# Altium PCB 07-AudioAmplifier(TDA7297).PcbDoc
Units mm, origin at the board's own origin, x right, y up, seen from the top; angles counter-clockwise.
Board outline 40 x 40 mm, 4 copper layers (Top Layer, Internal Plane 1, Internal Plane 2, Bottom Layer), stack 0.462 mm thick; 19 components, 18 nets, 58 pads, 16 vias.
Unrouted connection lines stored in the file: 37.
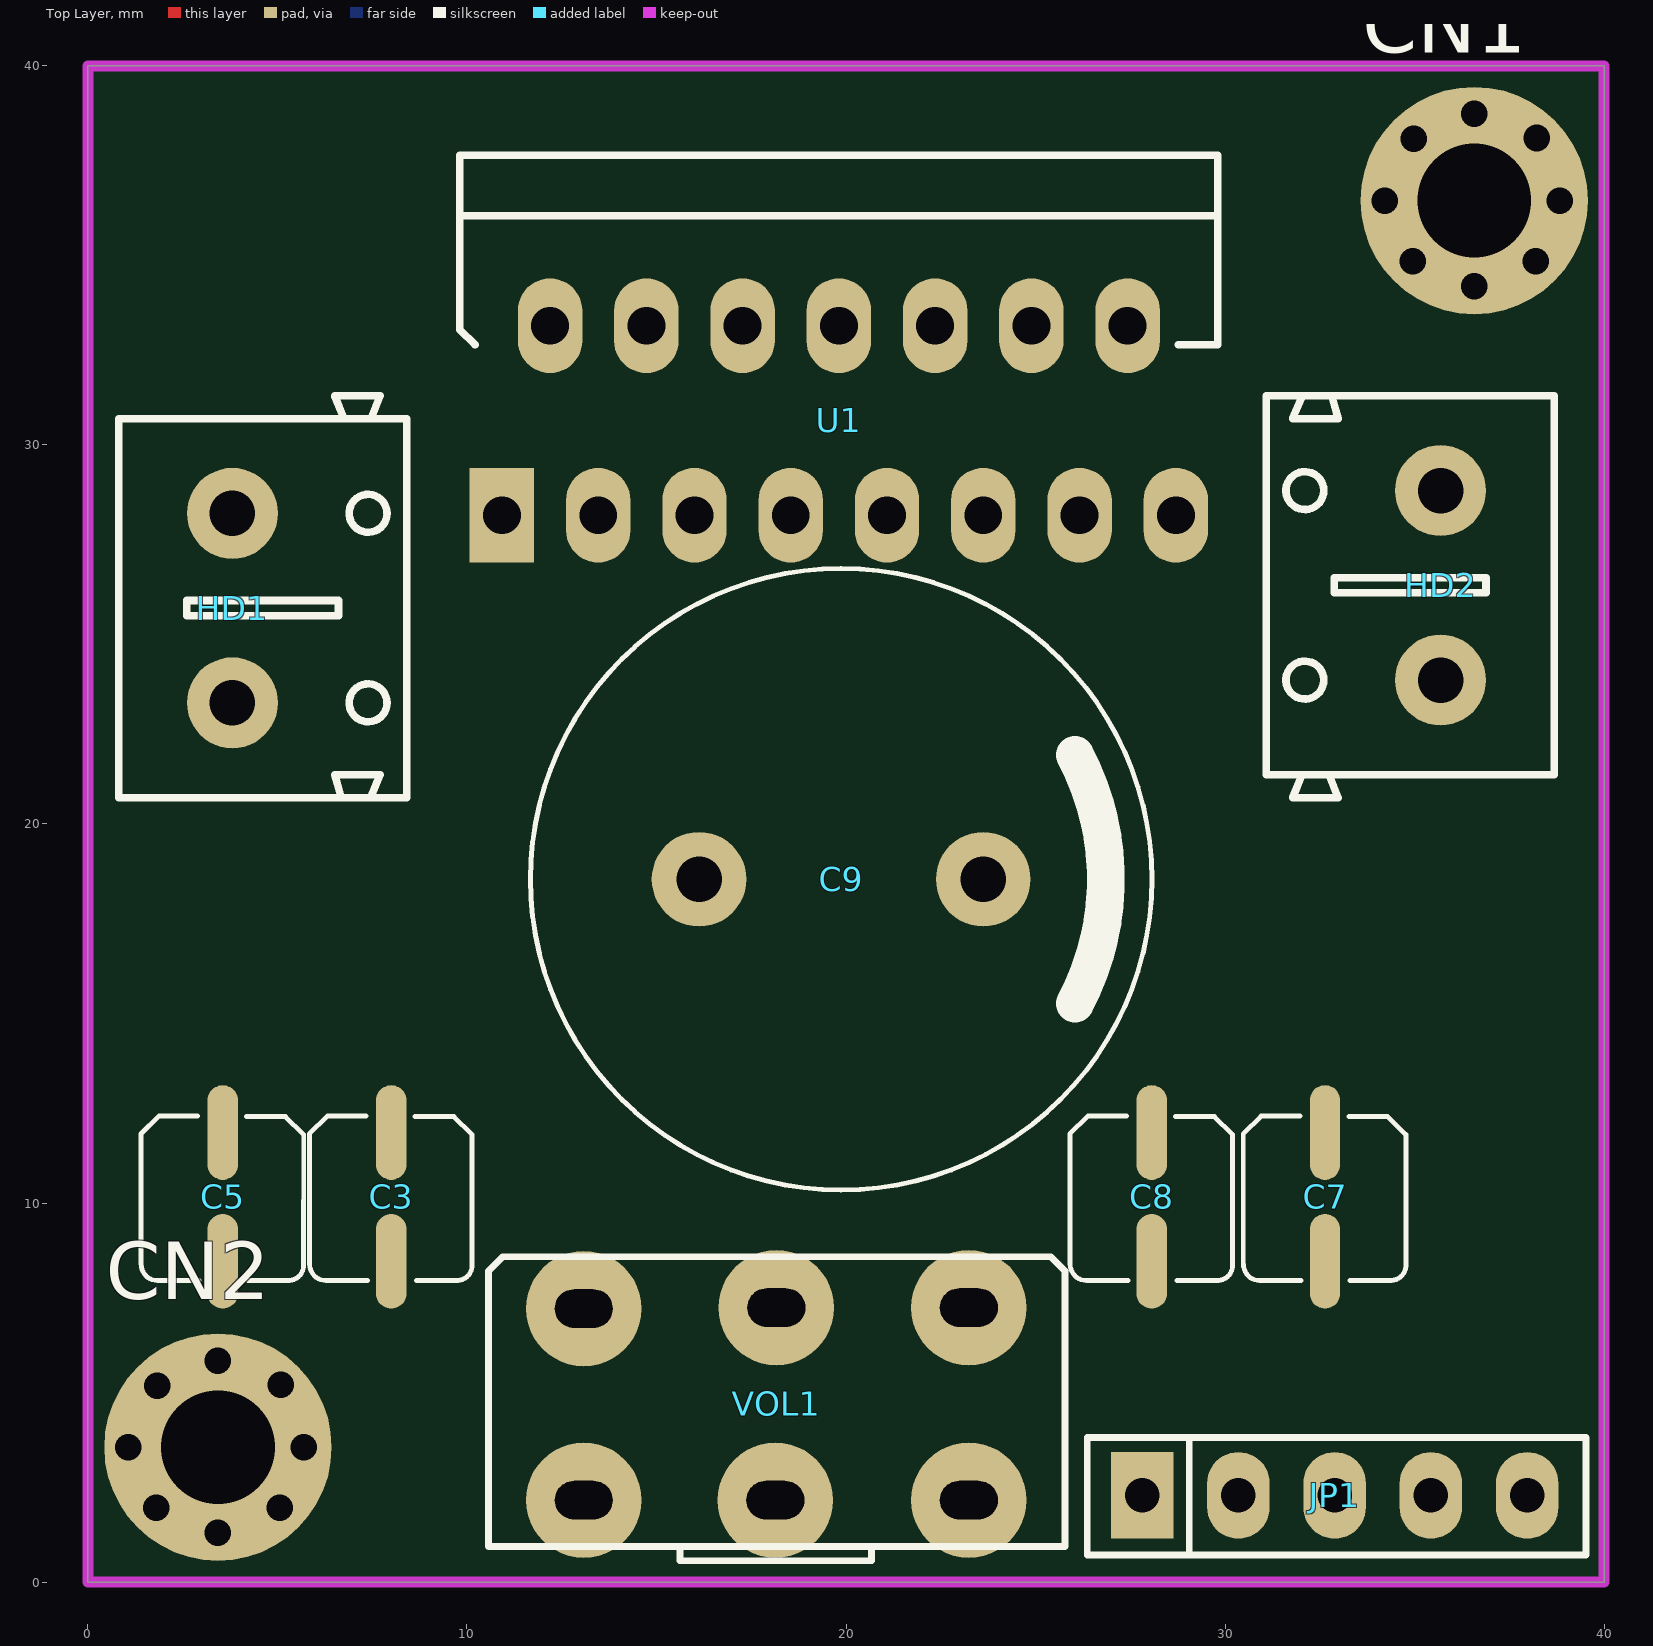
[diagram p0: Top Layer view]
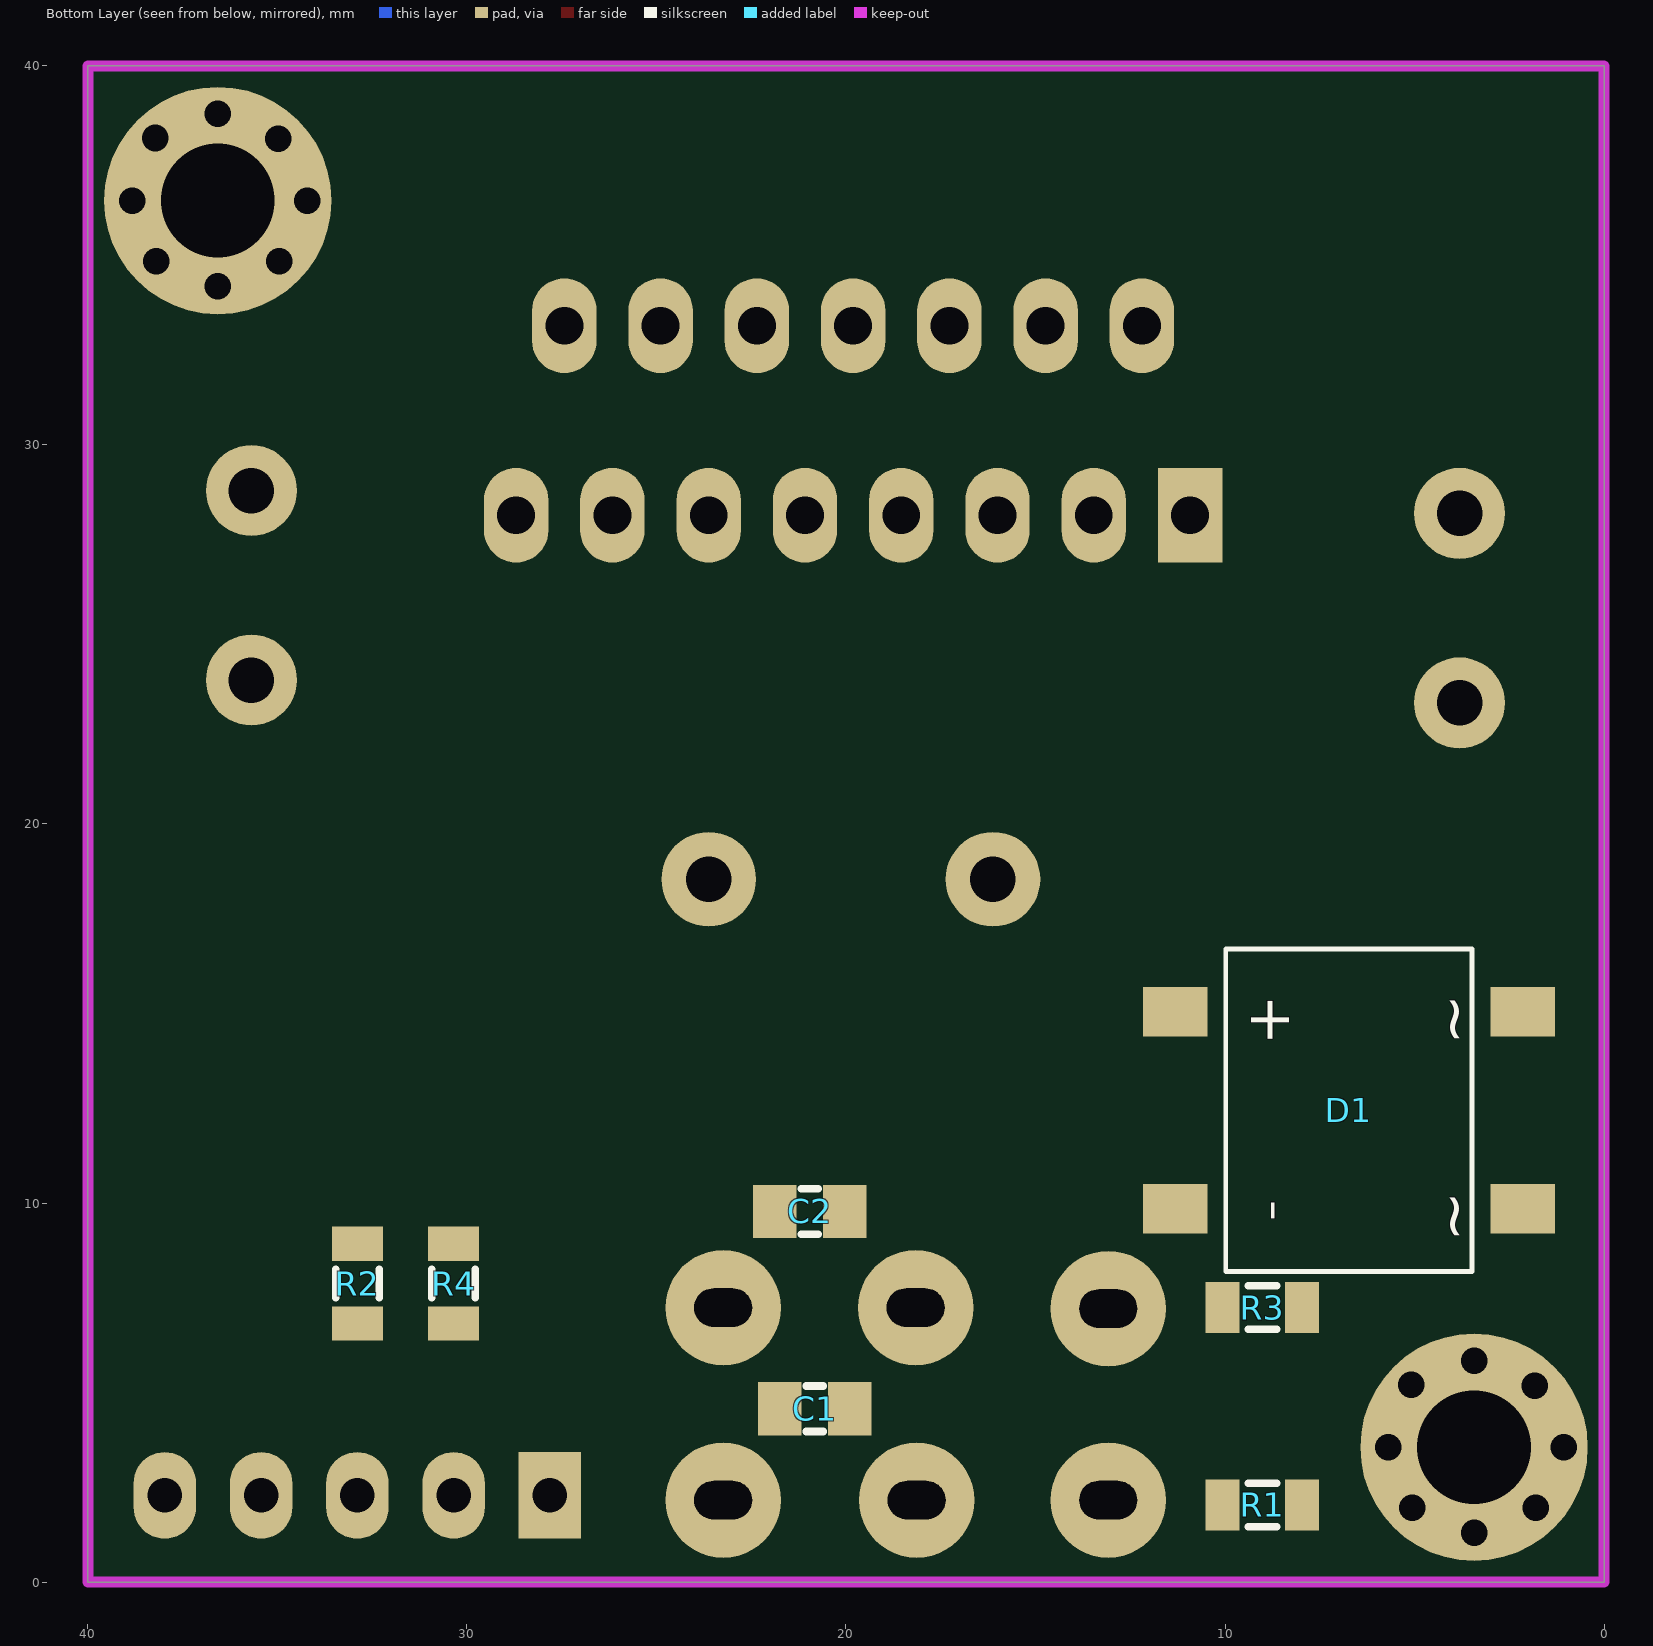
[diagram p1: Bottom Layer view, seen from below]
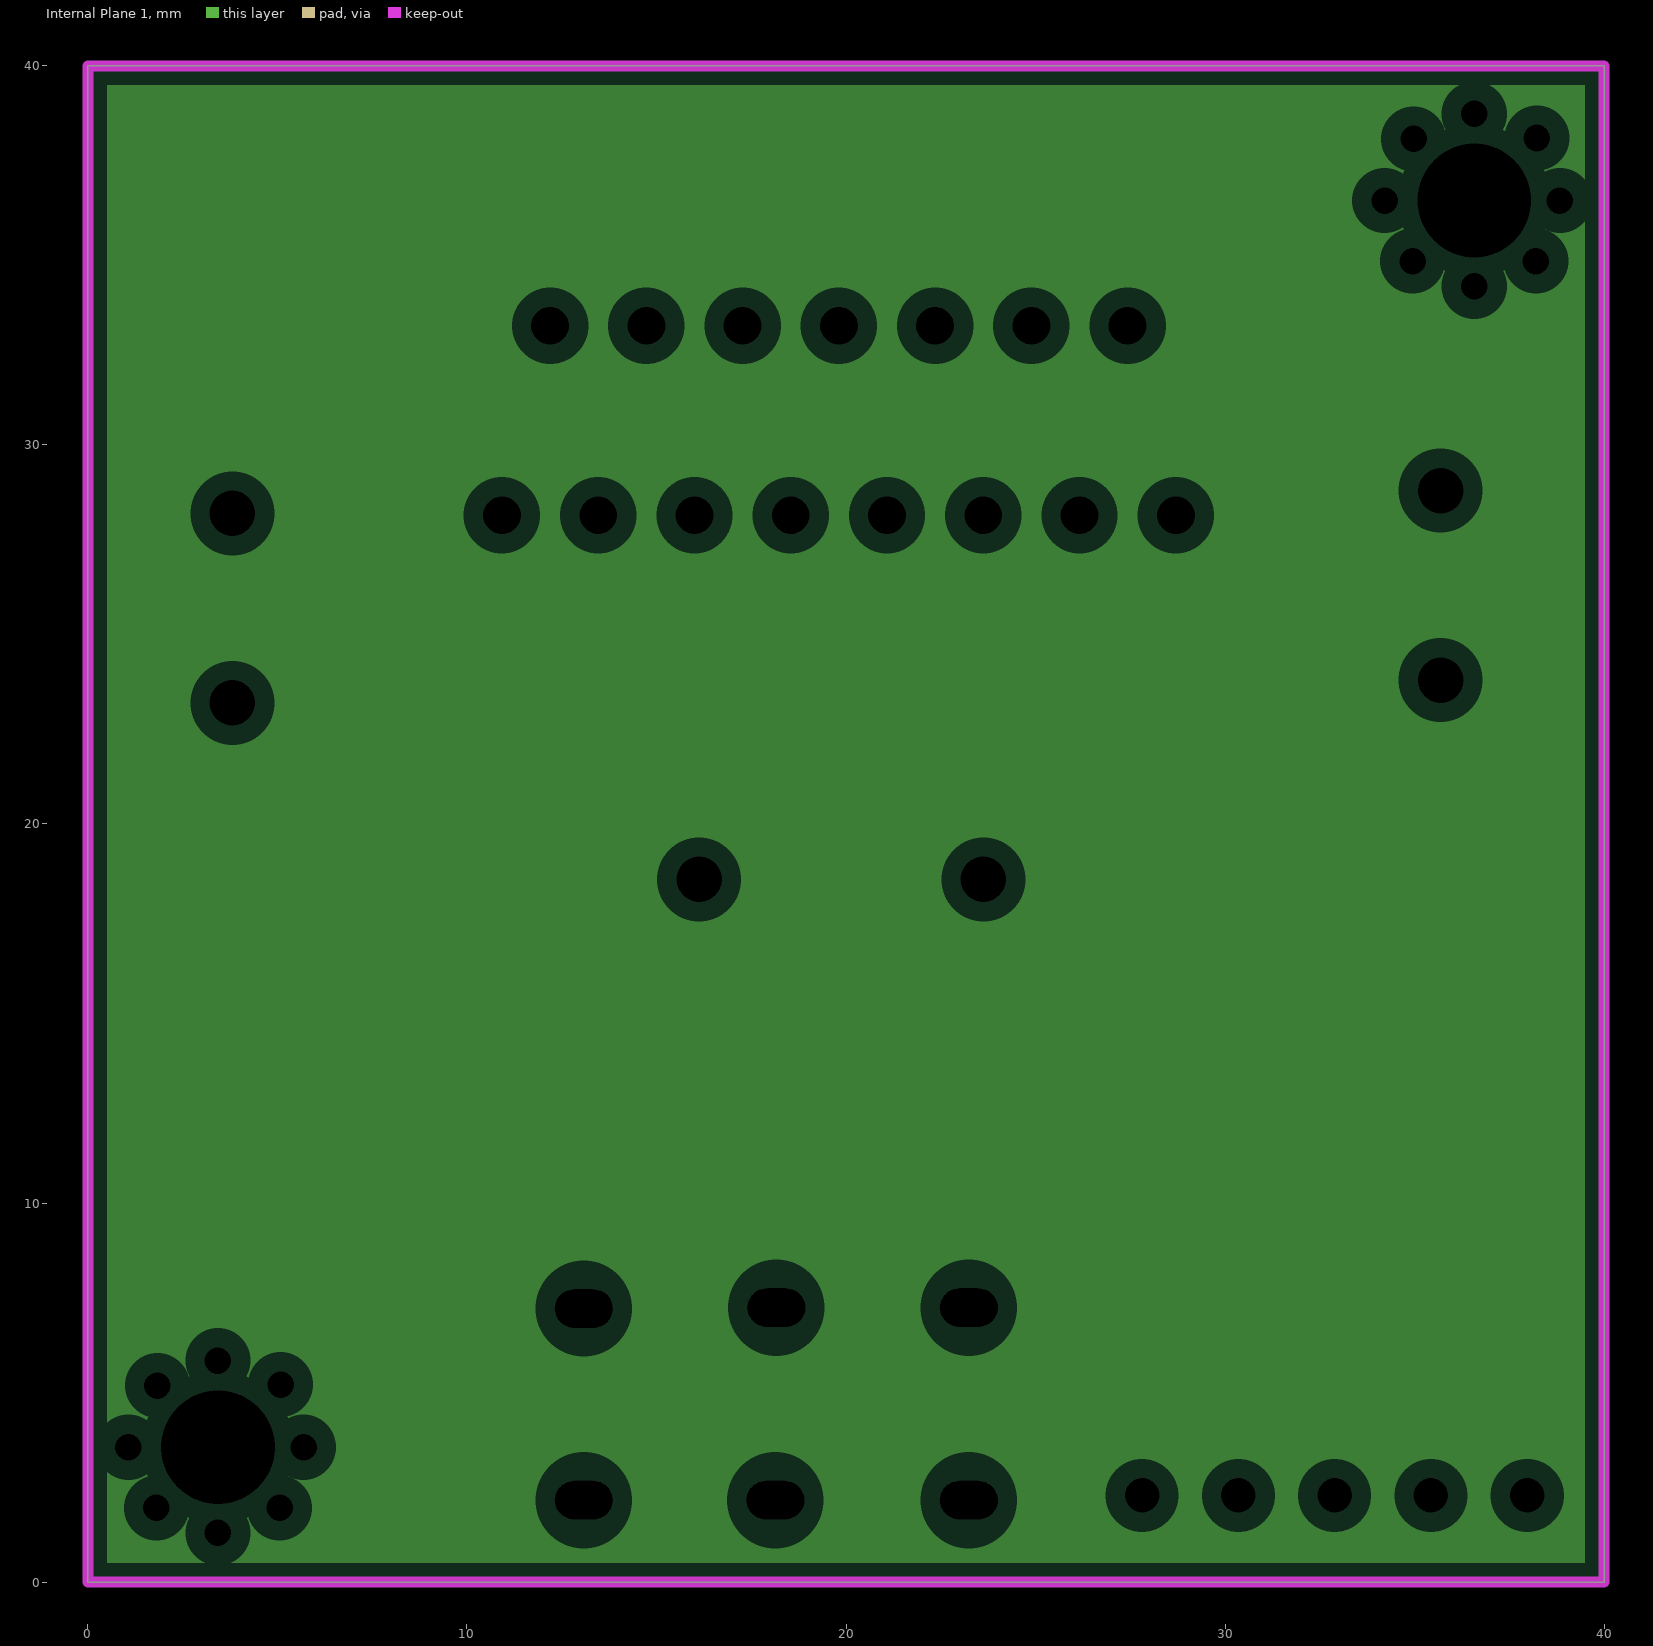
[diagram p2: Internal Plane 1, clearances drawn from the general rule]
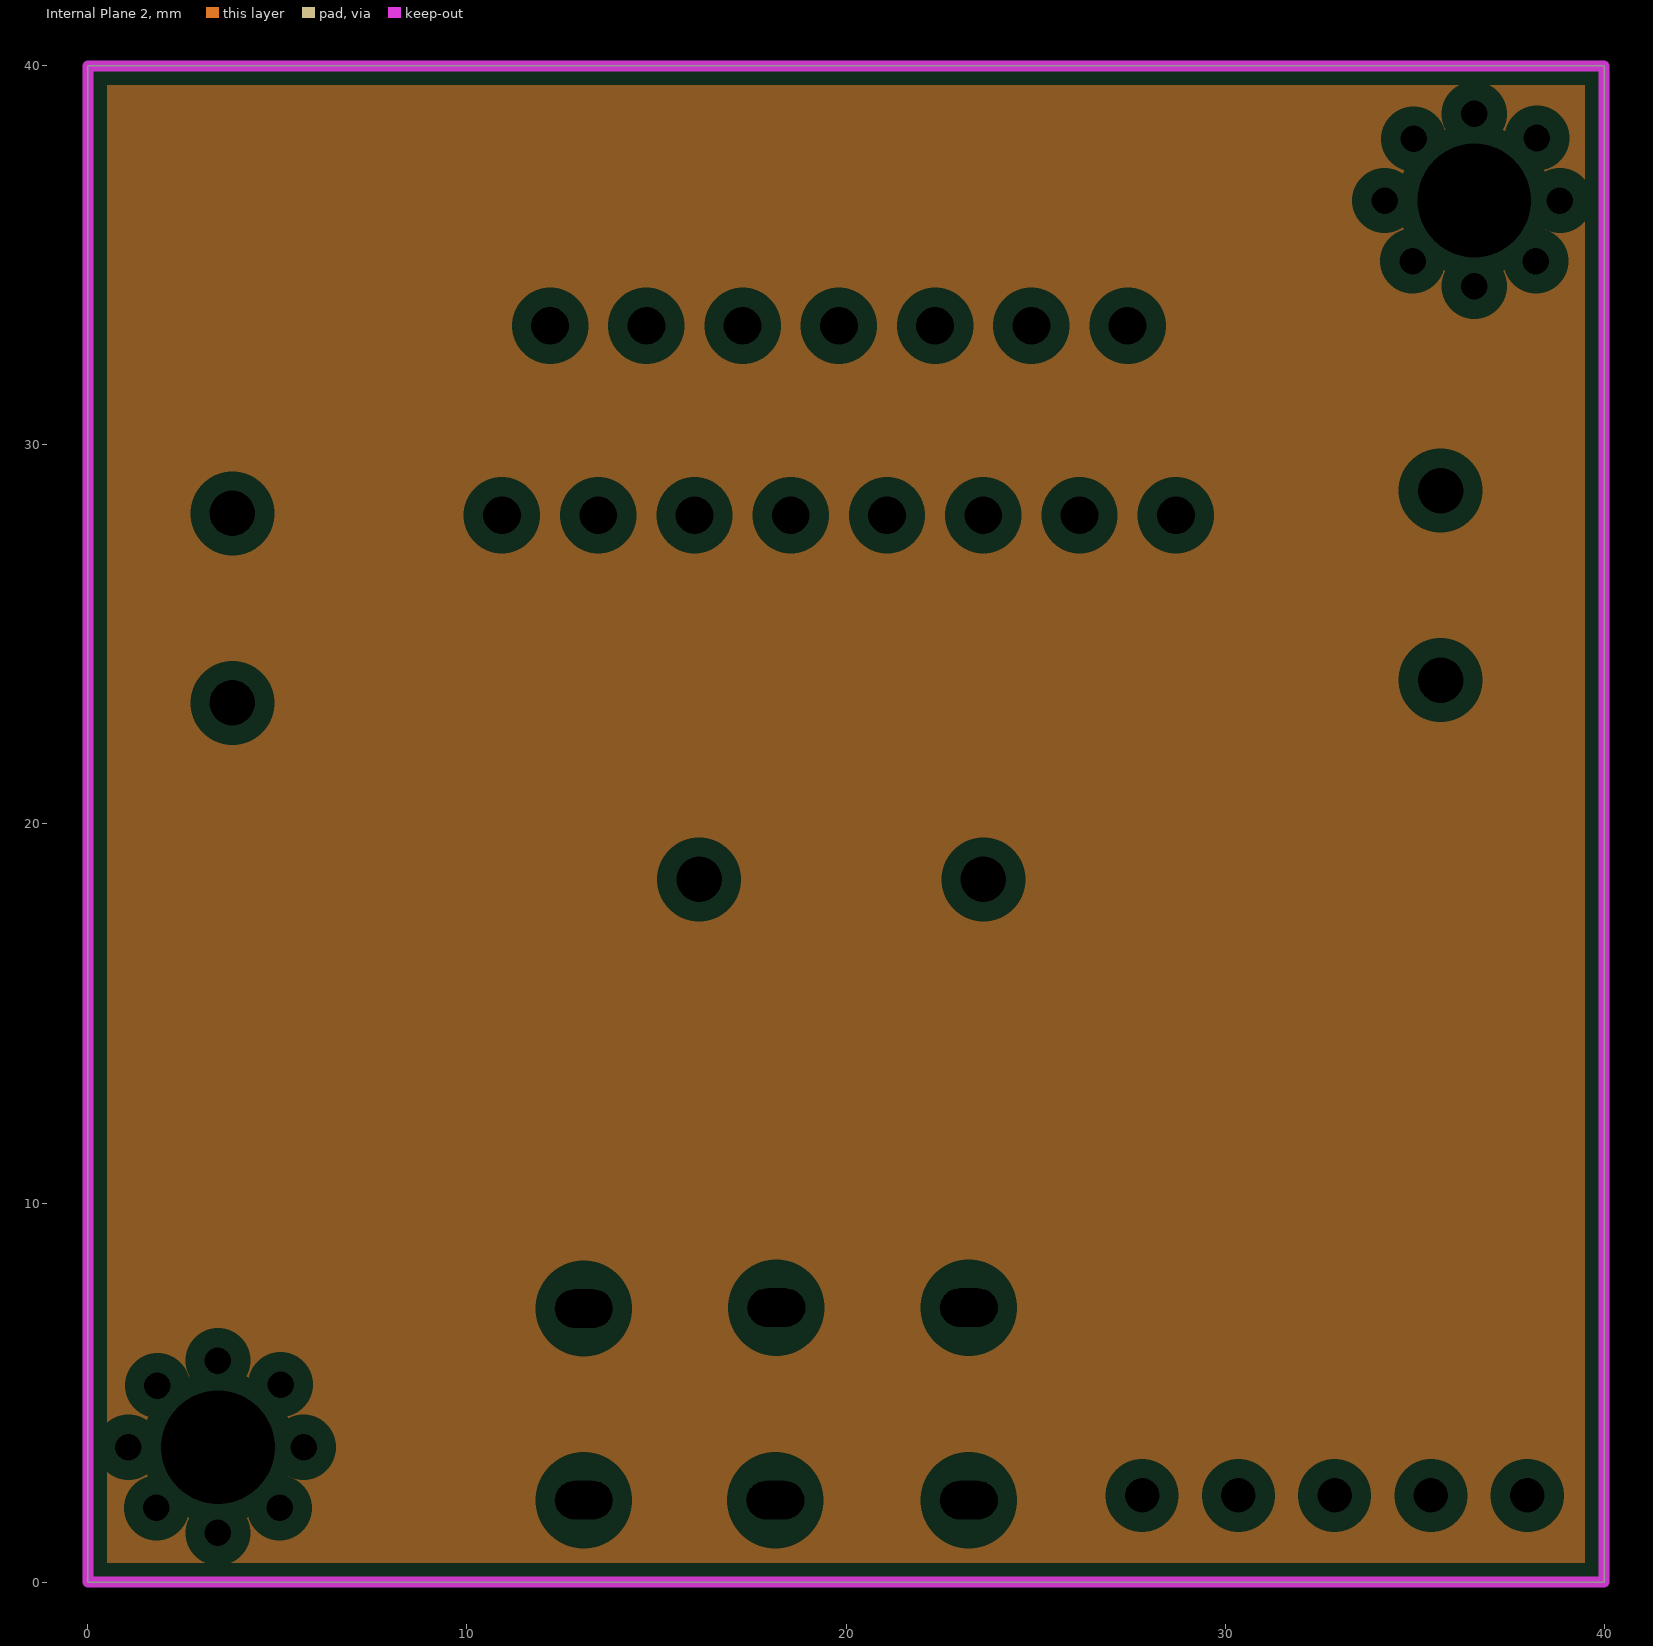
[diagram p3: Internal Plane 2, clearances drawn from the general rule]

## Layer stack, top to bottom
Top Solder: solder mask 0.0102, Solder Resist, Dk 3.5
Top Layer: signal copper 0.0356
Internal Plane 1: plane copper 0.0356
Internal Plane 2: plane copper 0.0356
Dielectric 1: dielectric 0.32, FR-4, Dk 4.8
Bottom Layer: signal copper 0.0356
Bottom Solder: solder mask 0.0102, Solder Resist, Dk 3.5

## Board outline
0,0 40,0 40,40 0,40

## Design rules (kind name [scope] priority, off if disabled: settings)
Clearance [All] p1: gap=0.2
ComponentClearance [All] p1 off: gap=0.254 collisioncheckmode=3 verticalgap=0.254 showdistances=FALSE
Height [All] p1 off: minheight=0 maxheight=25.4 prefheight=12.7
HoleSize [All] p1 off: absolutevalues=TRUE maxlimit=2.54 minlimit=0.025 maxpercent=80.000 minpercent=20.000
MinimumSolderMaskSliver [All] p1 off: minsoldermaskwidth=0.254
PlaneClearance [All] p1: clearance=0.508
PlaneConnect [All] p1: planeconnectstyle=Relief reliefexpansion=0.508 reliefentries=4 reliefconductorwidth=0.254 reliefairgap=0.254
PolygonConnect [All] p1: connectstyle=Relief reliefconductorwidth=0.254 reliefentries=4 polygonreliefangle="90 Angle" airgapwidth=0.254
RoutingVias [All] p1: holewidth=0.6 width=1 viastyle="Through Hole" minholewidth=0.711 minwidth=1.27 maxholewidth=0.711 maxwidth=1.27
SolderMaskExpansion [All] p1: expansion=0.102
Width [All] p1: maxlimit=0.2 minlimit=0.2 preferedwidth=0.2
24 further rules are at their usual default settings.

## Components (designator, comment, footprint, x,y, rotation, side; value= is the part's Value field where it differs from the comment)
C1 "224" C-0805 20.828,4.572 r0 bottom
C2 "224" C-0805 20.955,9.779 r0 bottom
C3 "2.2uF" ALU-4X5mm 8.001,10.16 r0 top
C5 "2.2uF" ALU-4X5mm 3.556,10.16 r0 top
C7 "1uF" ALU-4X5mm 32.639,10.16 r0 top
C8 "10uF" ALU-4X5mm 28.067,10.16 r0 top
C9 "680uF/35V" C-16x26mm 19.872,18.542 r0 top
CN1 "COCDONGM3" M3 36.576,36.449 r0 top
CN2 "COCDONGM3" M3 3.429,3.556 r0 top
D1 "DB 1A" D-DB-DF06S-E3-45 6.731,12.446 r270 bottom
HD1 "Header 2" TER-KF301-2 3.81,25.697 r270 top
HD2 "Header 2" TER-KF301-2 35.687,26.297 r90 top
JP1 "JP5" JP5 27.813,2.286 r0 top
R1 "10k" R-0805 9.017,2.032 r180 bottom
R2 "10k" R-0805 32.893,7.874 r90 bottom
R3 "10k" R-0805 9.017,7.239 r180 bottom
R4 "10k" R-0805 30.353,7.874 r90 bottom
U1 "TDA7297" MULTIWATT-15V 19.812,37.647 r0 top
VOL1 "50K" VOL-D 18.161,2.159 r0 top

## Footprints (in the part's own frame and the unit in brackets; to place one, negate y for a bottom-side part, rotate by r counter-clockwise, add the part's x,y. Pads: shape width x height; smd on the part's side, far side on the other; paste and mask are expansions set on the pad)
ALU-4X5mm [mm] "Aluminum Electrolytic Capacitor, Body 4.00x3.00x5.40mm, IPC Low Density"
  oval 0.8x2.5 smd: 1(0,1.7) 2(0,-1.7)
  silkscreen extent -2.16,-2.2 2.13,2.13, body extent -2.15,-2.55 2.15,2.45, height 5.4
C-16x26mm [mm] "C-16x26(P7.5mm)"
  round 2.5 hole 1.2: 1(-3.75,0) 2(3.75,0)
  silkscreen extent -8.2,-8.2 8.2,8.2, body extent -8,-7.99 8,7.99, height 26
C-0805 [mm] "Chip Capacitor, 2-Leads, Body 2.0x1.3mm, IPC Medium Density"
  rect 1.15x1.4 smd: 1(-0.925,0) 2(0.925,0)
  silkscreen extent -0.22,-0.6 0.23,0.6, body extent -1,-0.63 1,0.62, height 0.5
D-DB-DF06S-E3-45 [mm]
  rect 1.3x1.7 smd: 1(-2.6,-4.584) 2(2.6,-4.584) 3(2.6,4.584) 4(-2.6,4.584)
  silkscreen extent -4.26,-3.25 4.26,3.25, body extent -4.26,-5.15 4.25,5.15, height 3.63
JP5 [mil] "JP5"
  rect 65x90 hole 36: 1(0,0)
  oval 65x90 hole 36: 2(100,0) 3(200,0) 4(300,0) 5(400,0)
  silkscreen extent -57,-62 461,60, body extent -48,-53 448,45, height 323
M3 [mm]
  round 6 hole 3: 1(0,0)
MULTIWATT-15V [mm] "TDA7294"
  rect 1.7x2.5 hole 1: 1(-8.89,-9.5)
  oval 1.7x2.5 hole 1: 2(-7.62,-4.5) 3(-6.35,-9.5) 4(-5.08,-4.5) 5(-3.81,-9.5) 6(-2.54,-4.5) 7(-1.27,-9.5) 8(0,-4.5) 9(1.27,-9.5) 10(2.54,-4.5) 11(3.81,-9.5) 12(5.08,-4.5) 13(6.35,-9.5) 14(7.62,-4.5) 15(8.89,-9.5)
  silkscreen extent -10,-5 10,0, body extent -9.8,-9.88 9.8,0.01, height 20.8
R-0805 [mm] "Chip Resistor, 2-Leads, Body 2.0x1.3mm, IPC Medium Density"
  rect 0.9x1.35 smd: 1(-1.05,0) 2(1.05,0)
  silkscreen extent -0.38,-0.58 0.38,0.58, body extent -1,-0.63 1,0.63, height 0.5
TER-KF301-2 [mm] "http://banlinhkien.vn/goods-987-con-2-kf301-2p-5-08mm-200mil.html"
  round 2.4 hole 1.2: 1(-2.5,0) 2(2.5,0)
  silkscreen extent -5.6,-3 5,4.6, body extent -5.6,-3 5,4.6, height 10.1
VOL-D [mil] "Volume control Dual"
  round 120 hole 40 slot 60 at 0 deg: 1(-200,0) 2(-1,0) 3(200,0) 4(-200,199) 5(0,200) 6(200,200)
  silkscreen extent -299,-63 300,253, body extent -339,-1309 331,299, height 835

## Part data
C1 C2: library part CN
C3 C5 C7 C8: library part CP1, "Cap P  0,1uF < 22uF , 16 - 50V"
C9: library part CP4, "Cap 1000uF/16V - 220uF/50V"
D1: library part DB
HD1 HD2: "Header, 2-Pin"
R1 R2 R3 R4: library part R, "Resistor 1/4W"
VOL1: library part VOL-D, "Volume control Dual"

## Via types
v1: diameter 1, hole 0.7, Top Layer to Bottom Layer, 16 vias

## Nets (pads, with @x,y where several pads share a name; then routed paths per layer and width w, separated by ;. In a path a pad name is that pad's centre, name@x,y a point inside that pad or via, vN(x,y) a via of type N, cw(c..) or ccw(c..) an arc to the next point about the centre after c; other vN are vias at no path point)
+12V: C9.1 D1.3 U1.3 U1.13
GND: C7.2 C8.2 C9.2 D1.4 JP1.1 R1.1 R3.1 U1.8 U1.9 VOL1.1 VOL1.4
IN1: C1.2 JP1.5 VOL1.3
IN2: C2.2 JP1.4 VOL1.6
MUTE: JP1.3 R2.1
NetC1_1: C1.1 C3.2 R1.2 VOL1.2
NetC2_1: C2.1 C5.2 R3.2 VOL1.5
NetC3_1: C3.1 U1.4
NetC5_1: C5.1 U1.12
NetC7_1: C7.1 R2.2 U1.6
NetC8_1: C8.1 R4.2 U1.7
NetCN1_1: CN1.1 D1.1
  other v1: 36.576,34.188 34.95,34.849 38.202,34.849 34.214,36.449 38.837,36.449 34.976,38.075 38.227,38.1 36.576,38.735
NetCN2_1: CN2.1 D1.2
  other v1: 3.429,1.295 1.803,1.956 5.055,1.956 1.067,3.556 5.69,3.556 1.829,5.182 5.08,5.207 3.429,5.842
NetHD1_1: HD1.1 U1.2
NetHD1_2: HD1.2 U1.1
NetHD2_1: HD2.1 U1.15
NetHD2_2: HD2.2 U1.14
ST-BY: JP1.2 R4.1
pads on no net: U1.5 U1.10 U1.11

## Keep-outs
Keep-Out Layer:
  the board outline again, w0.3

## Text inside footprints (layer, text, board x,y; h text height)
D1: Bottom Overlay "+" at 9.689,15.494 h2 r90; Bottom Overlay "-" at 9.525,10.086 h2 r90; Bottom Overlay "~" at 4.826,15.511 h2 r90; Bottom Overlay "~" at 4.826,10.311 h2 r90